# Altium PCB motor_driver7.PcbDoc
Units mm, origin at the board's own origin, x right, y up, seen from the top; angles counter-clockwise.
Board outline 27.3 x 14.1 mm, 2 copper layers (Top Layer, Bottom Layer); 20 components, 20 nets, 68 pads, 13 vias.
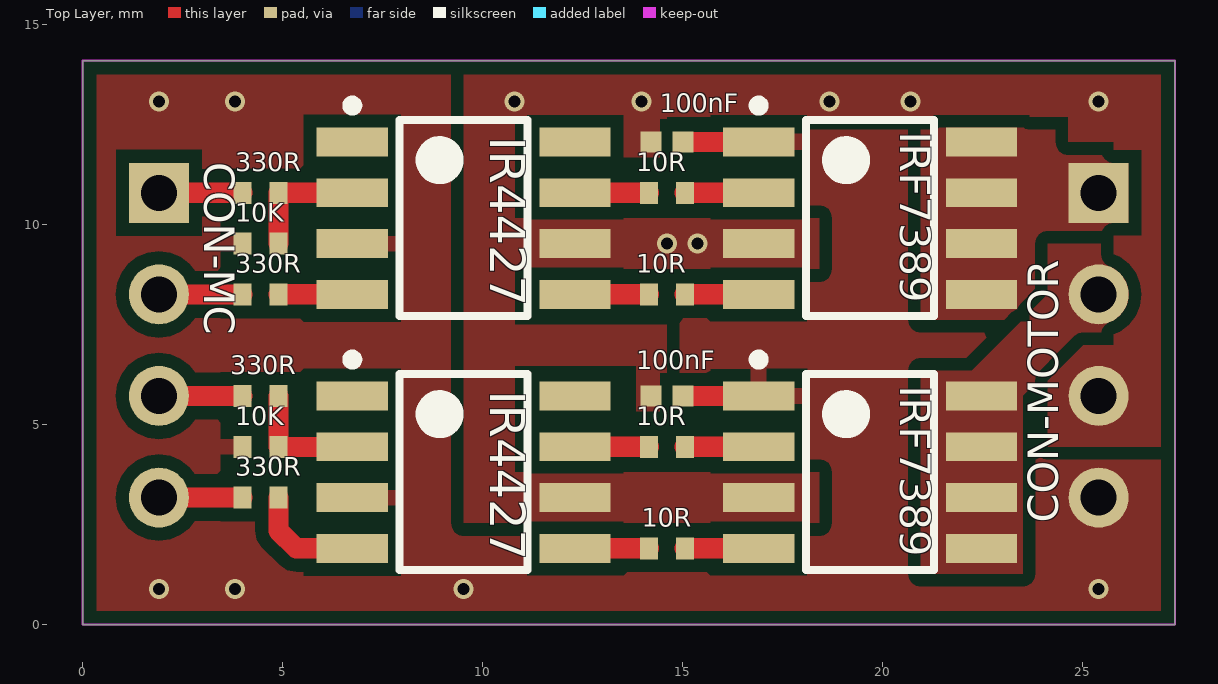
[diagram p0: Top Layer view]
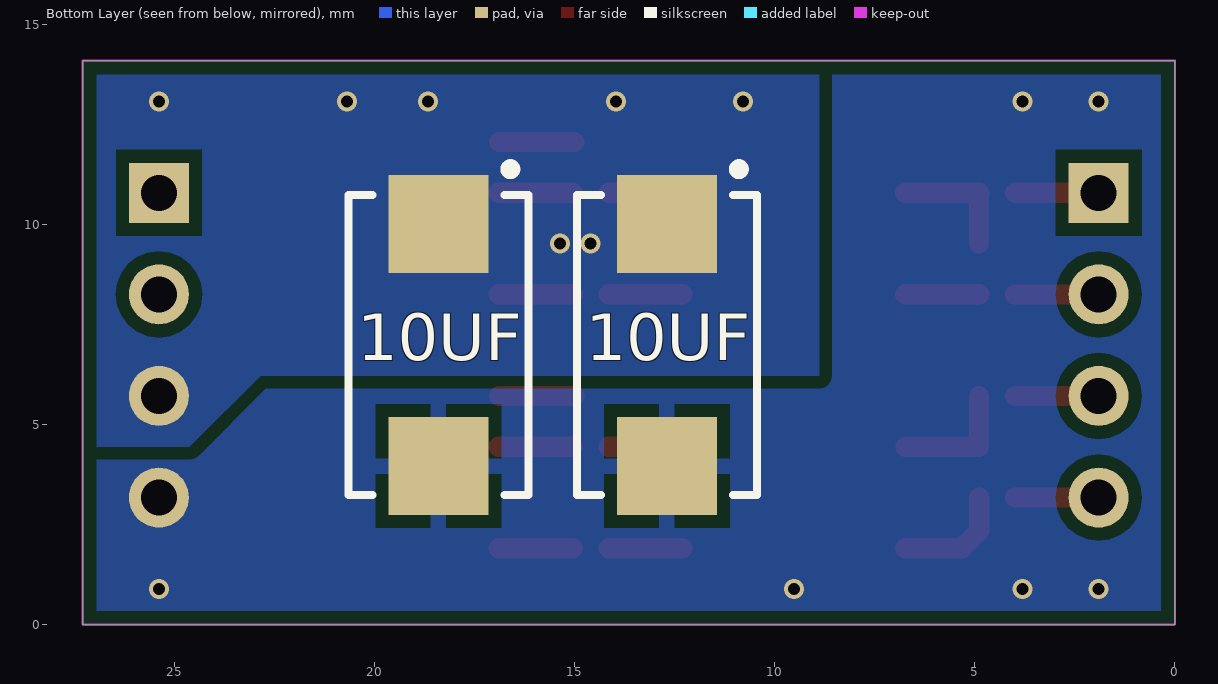
[diagram p1: Bottom Layer view, seen from below]

## Layer stack, top to bottom
Top Solder: solder mask 0.0102, Solder Resist, Dk 3.5
Top Layer: signal copper 0.0356
Dielectric 1: dielectric 0.32, FR-4, Dk 4.8
Bottom Layer: signal copper 0.0356
Bottom Solder: solder mask 0.0102, Solder Resist, Dk 3.5

## Board outline
0,0 27.305,0 27.305,14.097 0,14.097

## Design rules (kind name [scope] priority, off if disabled: settings)
Clearance Clearance_1 [InNamedPolygon('VCC_L02_P075')] p1 off: gap=0.16
Clearance [All] p2: gap=0.32 except(0.28: Track-SMDPad SMDPad-SMDPad)
MinimumSolderMaskSliver [All] p1 off: minsoldermaskwidth=0.254
PlaneConnect [All] p1: planeconnectstyle=Relief reliefexpansion=0.508 reliefentries=4 reliefconductorwidth=0.5 reliefairgap=0.254
PolygonConnect [IsVia] p1: connectstyle=Direct reliefconductorwidth=0.254 reliefentries=4 polygonreliefangle="90 Angle" airgapwidth=0.254
PolygonConnect "Schematic Polygon Connect Style_9" [InNet('MA_MBHB')] p2: connectstyle=Direct reliefconductorwidth=0.254 reliefentries=4 polygonreliefangle="45 Angle" airgapwidth=0.254
PolygonConnect "Schematic Polygon Connect Style_8" [InNet('MA')] p3: connectstyle=Direct reliefconductorwidth=0.254 reliefentries=4 polygonreliefangle="45 Angle" airgapwidth=0.254
PolygonConnect "Schematic Polygon Connect Style_7" [InComponent('C2_MAHB')] p4: connectstyle=Direct reliefconductorwidth=0.254 reliefentries=4 polygonreliefangle="45 Angle" airgapwidth=0.254
PolygonConnect "Schematic Polygon Connect Style" [InComponent('C2_MBHB')] p5: connectstyle=Relief reliefconductorwidth=0.5 reliefentries=4 polygonreliefangle="90 Angle" airgapwidth=0.32
PolygonConnect PolygonConnect_2 [IsThruPin] p6: connectstyle=Direct reliefconductorwidth=0.5 reliefentries=4 polygonreliefangle="90 Angle" airgapwidth=0.254
PolygonConnect "Schematic Polygon Connect Style_5" [InNet('NetIC2_4')] p7 off: connectstyle=Direct reliefconductorwidth=0.254 reliefentries=4 polygonreliefangle="45 Angle" airgapwidth=0.254
PolygonConnect "Schematic Polygon Connect Style_4" [InNet('NetIC4_2')] p8 off: connectstyle=Direct reliefconductorwidth=0.254 reliefentries=4 polygonreliefangle="45 Angle" airgapwidth=0.254
PolygonConnect "Schematic Polygon Connect Style_3" [InNet('NetIC4_4')] p9 off: connectstyle=Direct reliefconductorwidth=0.254 reliefentries=4 polygonreliefangle="45 Angle" airgapwidth=0.254
PolygonConnect "Schematic Polygon Connect Style_2" [InNet('NetIC4_5')] p10 off: connectstyle=Direct reliefconductorwidth=0.254 reliefentries=4 polygonreliefangle="45 Angle" airgapwidth=0.254
PolygonConnect "Schematic Polygon Connect Style_1" [InNet('MA')] p11 off: connectstyle=Direct reliefconductorwidth=0.254 reliefentries=4 polygonreliefangle="45 Angle" airgapwidth=0.254
PolygonConnect PolygonConnect_1 [InNet('VCC')] p12: connectstyle=Direct reliefconductorwidth=0.5 reliefentries=4 polygonreliefangle="90 Angle" airgapwidth=0.254
PolygonConnect PolygonConnect_3 [All] p13: connectstyle=Relief reliefconductorwidth=0.4 reliefentries=4 polygonreliefangle="90 Angle" airgapwidth=0.32
RoutingVias [All] p1: holewidth=0.3 width=0.6 viastyle="Through Hole" minholewidth=0.2 minwidth=0.5 maxholewidth=0.4 maxwidth=1.27
SilkToSilkClearance [All] p1 off: silktosilkclearance=0.254
SilkToSolderMaskClearance [IsPad] p1 off: minsilkscreentomaskgap=0.254 clearancetoexposedcopper=TRUE
SolderMaskExpansion [All] p1: expansion=0.102
Width [All] p1: maxlimit=1 minlimit=0.254 preferedwidth=0.254
26 further rules are at their usual default settings.

## Classes and differential pairs
channel class half_bridge: MAHB MBHB
component class MBHB: 10R 10UF 330R
component class MAHB: 10K 10R 10UF 100nF 330R IR4427 IRF7389
component class motor_driver: CON-MC CON-MOTOR R4 R5

## Components (designator, comment, footprint, x,y, rotation, side; value= is the part's Value field where it differs from the comment)
10K "10K" 0402-RES-HD 4.445,9.525 r0 top (schematic designator R3)
10K "10K" 0402-RES-HD 4.445,4.445 r0 top (schematic designator R3)
10R "10R" 0402-RES-HD 14.605,8.255 r0 top (schematic designator R5)
10R "10R" 0402-RES-HD 14.605,1.905 r0 top (schematic designator R5)
10R "10R" 0402-RES-HD 14.605,10.795 r0 top (schematic designator R4)
10R "10R" 0402-RES-HD 14.605,4.445 r0 top (schematic designator R4)
10UF "4,7UF" PCBComponent 12.7,6.985 r270 bottom (schematic designator C2)
10UF "4,7UF" PCBComponent 18.415,6.985 r270 bottom (schematic designator C2)
100nF "100pF" 0402-CAP 14.605,12.065 r0 top (schematic designator C1)
100nF "100pF" 0402-CAP 14.605,5.715 r0 top (schematic designator C1)
330R "330R" 0402-RES-HD 4.445,8.255 r0 top (schematic designator R2)
330R "330R" 0402-RES-HD 4.445,3.175 r0 top (schematic designator R2)
330R "330R" 0402-RES-HD 4.445,10.795 r0 top (schematic designator R1)
330R "330R" 0402-RES-HD 4.445,5.715 r0 top (schematic designator R1)
CON-MC "22032041" 04x01_Conector_Male 1.905,6.985 r90 top
CON-MOTOR "22032041" 04x01_Conector_Male 25.4,6.985 r90 top
IR4427 "IR4427STRPBF" IR4427-PCB 9.525,10.16 r0 top
IR4427 "IR4427STRPBF" IR4427-PCB 9.525,3.81 r0 top
IRF7389 "IRF7389TRPBF" IRF7389-PCB 19.685,10.16 r0 top
IRF7389 "IRF7389TRPBF" IRF7389-PCB 19.685,3.81 r0 top

## Footprints (in the part's own frame and the unit in brackets; to place one, negate y for a bottom-side part, rotate by r counter-clockwise, add the part's x,y. Pads: shape width x height; smd on the part's side, far side on the other; paste and mask are expansions set on the pad)
04x01_Conector_Male [mm] "0022032041"
  round 1.5 hole 0.9: 0(-3.81,0) 1(-1.27,0) 2(1.27,0)
  rect 1.5x1.5 hole 0.9: 3(3.81,0)
  body extent -4.95,-1.18 4.95,1.18, height 3.38
0402-CAP [mm] "Chip Capacitor, Body 1.0x0.5mm, Height 0.6mm, IPC Medium Density"
  rect 0.52x0.52 smd: 1(-0.4,0) 2(0.4,0)
  body extent -0.55,-0.3 0.55,0.3, height 0.33
0402-RES-HD [mm] "Chip Resistor, Body 1.0x0.5mm, IPC High Density"
  rect 0.45x0.55 smd: 1(-0.45,0) 2(0.45,0)
  body extent -0.52,-0.27 0.53,0.28, height 0.4
IR4427-PCB [mm] "SOIC, 8-Leads, Body 4,85x3,90mm, Pitch 1,27mm, IPC Medium Density"
  rect 1.78x0.72 smd: 1(-2.785,1.905) 2(-2.785,0.635) 3(-2.785,-0.635) 4(-2.785,-1.905) 5(2.785,-1.905) 6(2.785,-0.635) 7(2.785,0.635) 8(2.785,1.905)
  silkscreen extent -2.91,-2.45 1.6,2.94, body extent -2,-2.45 2,2.45, height 1.75
IRF7389-PCB [mm] "SOIC, 8-Leads, Body 4,85x3,90mm, Pitch 1,27mm, IPC Medium Density"
  rect 1.78x0.72 smd: 1(-2.785,1.905) 2(-2.785,0.635) 3(-2.785,-0.635) 4(-2.785,-1.905) 5(2.785,-1.905) 6(2.785,-0.635) 7(2.785,0.635) 8(2.785,1.905)
  silkscreen extent -2.91,-2.45 1.6,2.94, body extent -2,-2.45 2,2.45, height 1.75
PCBComponent [mm]
  rect 2.45x2.5 smd: 1(-3.025,0) 2(3.025,0)
  silkscreen extent -4.52,-2.25 3.75,2.25, body extent -3.75,-2.25 3.75,2.25, height 2.9

## Part data
10K 10K: library part R0402-10K-10, "RES 10K OHM 1/10W 1% 0402 SMD"
10R 10R 10R 10R: library part R0402-10R-6, "RES 10 OHM 1/10W 1% 0402 SMD"
10UF 10UF: library part TPSD106K035R0300-01.A.1, "Tantalum Capacitors - Solid SMD 10uF 35V 10% L ESR"
100nF 100nF: library part CC0402-100pF-A.2, "CAP CER 100PF 50V 1% NP0 0402"
330R 330R 330R 330R: library part R0402-330R-7, "RES 330 OHM 1/10W 1% 0402 SMD"
CON-MC CON-MOTOR: library part 04x01_Conector_Male-SCH, "CONN HEADER 4POS .100 VERT TIN"
IR4427 IR4427: library part IR4427, "IC DRIVER DUAL LOW SIDE 8-DIP"
IRF7389 IRF7389: library part IRF7389, "MOSFET N/P-CH 30V 8-SOIC"

## Via types
v1: diameter 0.5, hole 0.3, Top Layer to Bottom Layer, 13 vias

## Nets (pads, with @x,y where several pads share a name; then routed paths per layer and width w, separated by ;. In a path a pad name is that pad's centre, name@x,y a point inside that pad or via, vN(x,y) a via of type N, cw(c..) or ccw(c..) an arc to the next point about the centre after c; other vN are vias at no path point)
GND: 10K.1 10UF.2 100nF.2 CON-MOTOR.0 IR4427.3 IRF7389.1 | length 3.8
  Top Layer w0.5: 100nF.2@15.005,5.715 IRF7389.1@16.9,5.715 ; 100nF.2@15.005,12.065 IRF7389.1@16.9,12.065
  other v1: 1.905,0.889 3.81,0.889 9.525,0.889 25.4,0.889 1.905,13.081 3.81,13.081
MA: CON-MOTOR.2 IRF7389.5@22.47,1.905 IRF7389.6@22.47,3.175 IRF7389.7@22.47,4.445 IRF7389.8@22.47,5.715
MA_MBHB: CON-MOTOR.3 IRF7389.5@22.47,8.255 IRF7389.6@22.47,9.525 IRF7389.7@22.47,10.795 IRF7389.8@22.47,12.065
MAH: 330R.1@3.995,3.175 CON-MC.0 | length 2.1
  Top Layer w0.508: CON-MC.0 330R.1@3.995,3.175
MAL: 330R.1@3.995,5.715 CON-MC.1 | length 2.1
  Top Layer w0.5: CON-MC.1 330R.1@3.995,5.715
MBH: 330R.1@3.995,8.255 CON-MC.2 | length 2.1
  Top Layer w0.5: CON-MC.2 330R.1@3.995,8.255
MBL: 330R.1@3.995,10.795 CON-MC.3 | length 2.1
  Top Layer w0.508: CON-MC.3 330R.1@3.995,10.795
NetIR4427_MAHB_2: 10K.2@4.895,4.445 330R.2@4.895,5.715 IR4427.2@6.74,4.445 | length 3.1
  Top Layer w0.5: 330R.2@4.895,5.715 4.895,4.445 IR4427.2@6.74,4.445
NetIR4427_MAHB_4: 330R.2@4.895,3.175 IR4427.4@6.74,1.905 | length 2.9
  Top Layer w0.508: 330R.2@4.895,3.175 4.895,2.344 5.334,1.905 IR4427.4@6.74,1.905
NetIR4427_MAHB_5: 10R.1@14.155,1.905 IR4427.5@12.31,1.905 | length 1.8
  Top Layer w0.508: IR4427.5@12.31,1.905 10R.1@14.155,1.905
NetIR4427_MAHB_7: 10R.1@14.155,4.445 IR4427.7@12.31,4.445 | length 1.8
  Top Layer w0.508: IR4427.7@12.31,4.445 10R.1@14.155,4.445
NetIR4427_MBHB_2: 10K.2@4.895,9.525 330R.2@4.895,10.795 IR4427.2@6.74,10.795 | length 3.1
  Top Layer w0.5: 10K.2@4.895,9.525 330R.2@4.895,10.795
  Top Layer w0.508: 330R.2@4.895,10.795 IR4427.2@6.74,10.795
NetIR4427_MBHB_4: 330R.2@4.895,8.255 IR4427.4@6.74,8.255 | length 1.8
  Top Layer w0.508: 330R.2@4.895,8.255 IR4427.4@6.74,8.255
NetIR4427_MBHB_5: 10R.1@14.155,8.255 IR4427.5@12.31,8.255 | length 1.8
  Top Layer w0.508: IR4427.5@12.31,8.255 10R.1@14.155,8.255
NetIR4427_MBHB_7: 10R.1@14.155,10.795 IR4427.7@12.31,10.795 | length 1.8
  Top Layer w0.508: IR4427.7@12.31,10.795 10R.1@14.155,10.795
NetIRF7389_MAHB_2: 10R.2@15.055,4.445 IRF7389.2@16.9,4.445 | length 1.8
  Top Layer w0.508: 10R.2@15.055,4.445 IRF7389.2@16.9,4.445
NetIRF7389_MAHB_4: 10R.2@15.055,1.905 IRF7389.4@16.9,1.905 | length 1.8
  Top Layer w0.508: 10R.2@15.055,1.905 IRF7389.4@16.9,1.905
NetIRF7389_MBHB_2: 10R.2@15.055,10.795 IRF7389.2@16.9,10.795 | length 1.8
  Top Layer w0.508: 10R.2@15.055,10.795 IRF7389.2@16.9,10.795
NetIRF7389_MBHB_4: 10R.2@15.055,8.255 IRF7389.4@16.9,8.255 | length 1.8
  Top Layer w0.508: 10R.2@15.055,8.255 IRF7389.4@16.9,8.255
VCC: 10UF.1 100nF.1 CON-MOTOR.1 IR4427.6 IRF7389.3
  other v1: 14.605,9.525 15.367,9.525 10.795,13.081 13.97,13.081 18.669,13.081 20.701,13.081 25.4,13.081
pads on no net: IR4427.1 IR4427.8

## Polygon pours and split planes (outlines as drawn)
GND on Top Layer "Top Layer-No Net" (solid, remove dead copper, pour order 90): 0,14.097 27.305,14.097 27.305,0 0,0
MA_MBHB on Top Layer "Top Layer-No Net" (solid, remove dead copper, pour order 78): 20.955,7.62 20.955,12.7 26.67,12.7 26.67,9.525 25.4,9.525 24.13,8.255 24.13,7.62
VCC on Top Layer "Top Layer-No Net" (solid, remove dead copper, pour order 73): 24.13,4.445 24.13,6.096 24.638,6.604 25.019,6.985 25.781,6.985 25.781,12.065 24.638,12.065 24.638,12.7 25.781,12.7 20.955,12.7 19.431,12.7 14.605,12.7 14.605,11.684 13.335,11.684 13.335,12.7 10.795,12.7 10.795,10.16 18.415,10.16 18.415,8.89 10.795,8.89 10.795,7.493 14.605,7.493 14.605,6.477 14.605,5.334 13.843,5.334 13.843,6.477 10.795,6.477 10.795,3.81 18.415,3.81 18.415,2.54 9.525,2.54 9.525,13.97 27.305,13.97 27.305,4.445
MA on Top Layer "Top Layer-No Net" (solid, remove dead copper, pour order 74): 26.289,9.525 24.13,9.525 24.13,8.255 22.225,6.35 20.955,6.35 20.955,1.27 23.495,1.27 23.495,5.715 24.765,6.985 26.289,6.985
VCC on Bottom Layer "Top Layer-No Net" (solid, remove dead copper, pour order 77): 27.305,4.445 24.638,4.445 22.86,6.223 8.89,6.223 8.89,6.985 8.89,14.097 27.305,14.097
GND on Bottom Layer "Top Layer-No Net" (solid, remove dead copper, pour order 94): 27.305,0 27.305,14.097 0,14.097 0,0

## Keep-outs
Keep-Out Layer:
  the board outline again, w0.05